# Altium PCB HighSpeed.PcbDoc
Units mm, origin at the board's own origin, x right, y up, seen from the top; angles counter-clockwise.
Board outline 152.4 x 101.6 mm, 4 copper layers (Top Layer, Signal Layer 1, Signal Layer 2, Bottom Layer), stack 0.778 mm thick; 138 components, 108 nets, 447 pads, 22 vias.
Unrouted connection lines stored in the file: 293.
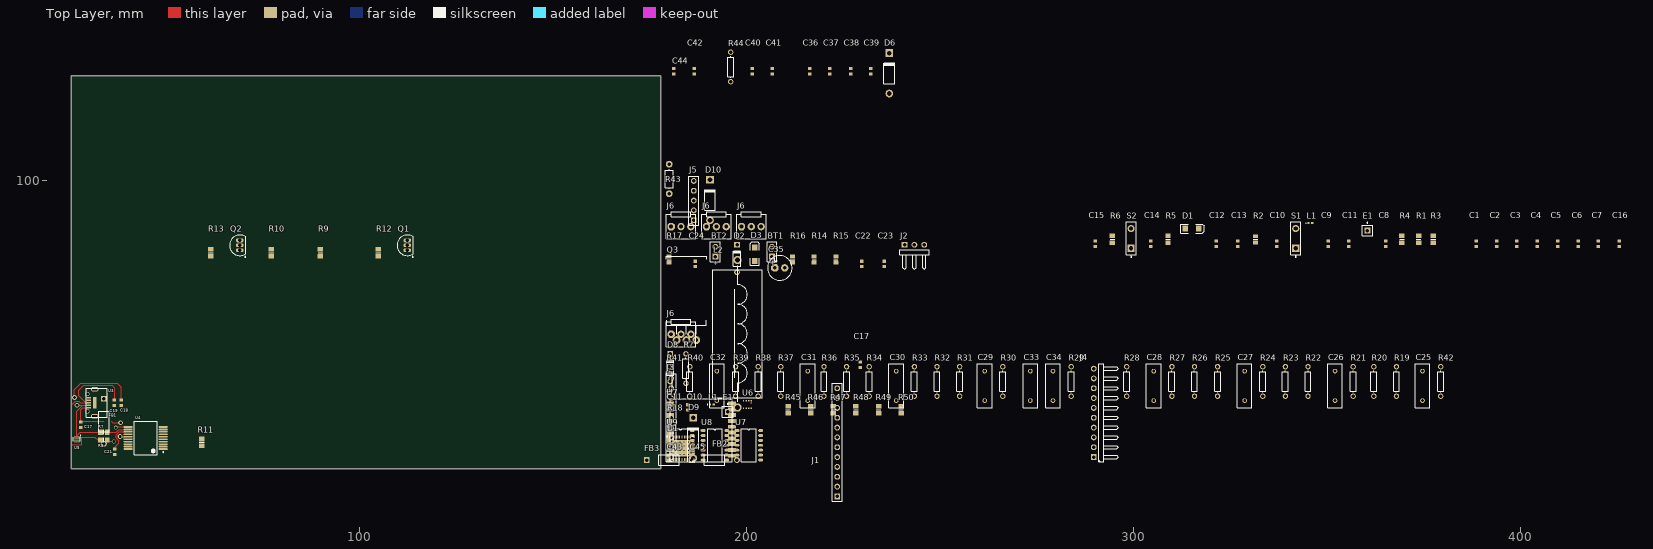
[diagram p0: Top Layer view]
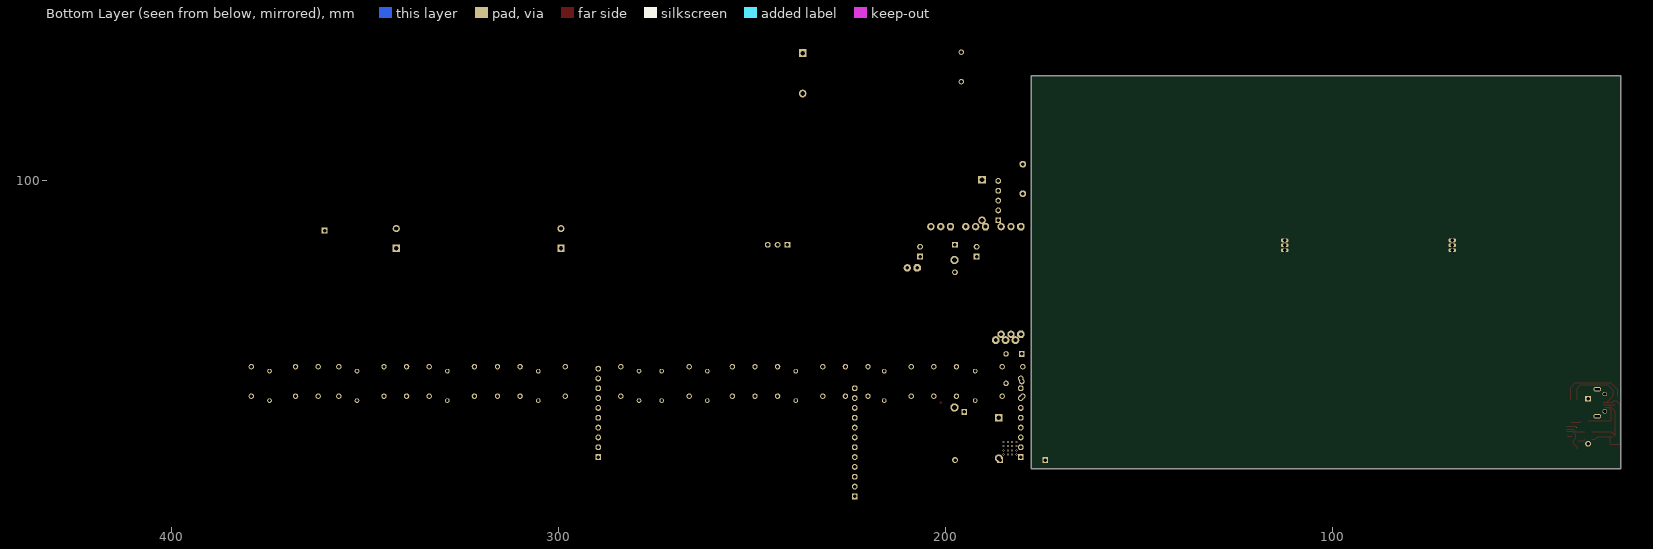
[diagram p1: Bottom Layer view, seen from below]
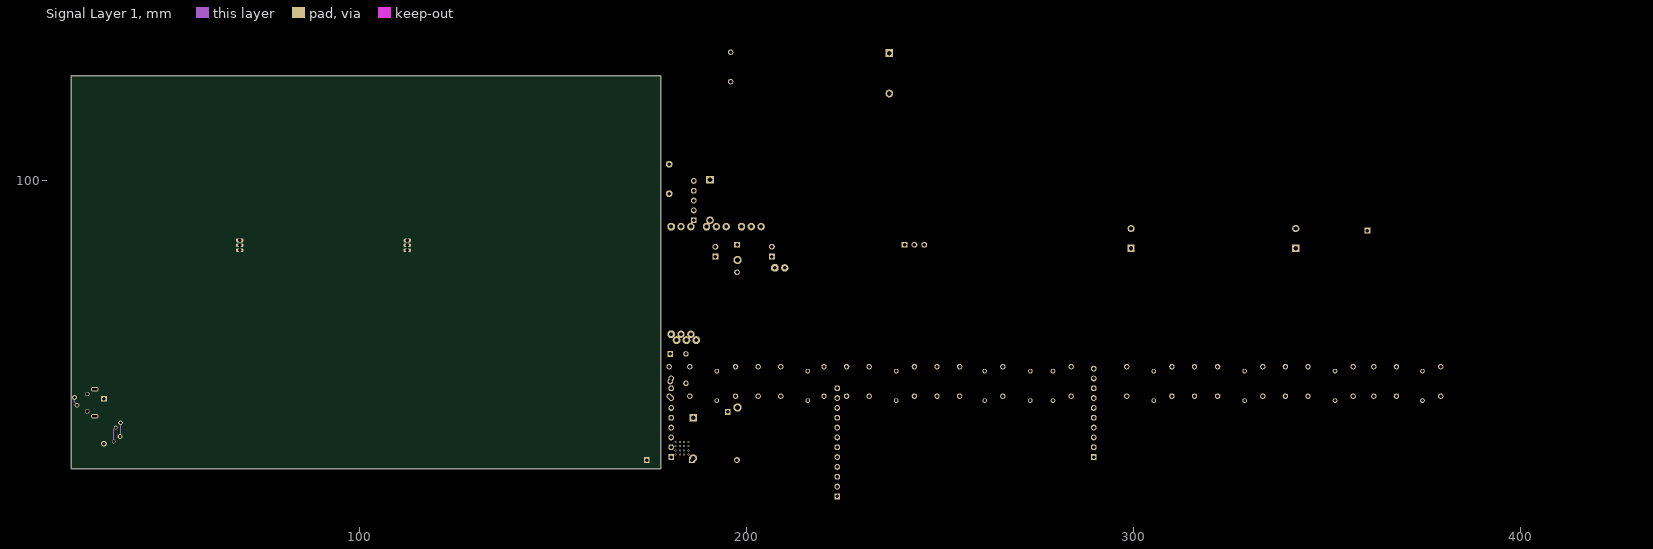
[diagram p2: Signal Layer 1]

## Layer stack, top to bottom
Top Solder: solder mask 0.0102, Solder Resist, Dk 3.5
Top Layer: signal copper 0.0356
Dielectric 1: core 0.254, FR-4, Dk 4.2
Signal Layer 1: signal copper 0.036
Dielectric 3: prepreg 0.127, Dk 4.2
Signal Layer 2: signal copper 0.036
Dielectric 2: core 0.254, Dk 4.2
Bottom Layer: signal copper 0.0356
Bottom Solder: solder mask 0.0102, Solder Resist, Dk 3.5

## Board outline
25.4,25.4 177.8,25.4 177.8,127 25.4,127

## Design rules (kind name [scope] priority, off if disabled: settings)
Clearance [All] p1: gap=0.254
DiffPairsRouting DiffPairsRouting_1 [All] p1: maxlimit=0.254 minlimit=0.254 mostfreqgap=0.254 toplayer_minwidth=0.15 toplayer_maxwidth=0.35 toplayer_prefwidth=0.2 midlayer1_minwidth=0.15 midlayer1_maxwidth=0.35 midlayer1_prefwidth=0.2 midlayer2_minwidth=0.15 midlayer2_maxwidth=0.35 midlayer2_prefwidth=0.2 bottomlayer_minwidth=0.15 bottomlayer_maxwidth=0.35 bottomlayer_prefwidth=0.2 maxuncoupledlength=12.7
DiffPairsRouting [All] p2: maxlimit=0.254 minlimit=0.254 mostfreqgap=0.254 toplayer_minwidth=0.381 toplayer_maxwidth=0.381 toplayer_prefwidth=0.381 midlayer1_minwidth=0.381 midlayer1_maxwidth=0.381 midlayer1_prefwidth=0.381 midlayer2_minwidth=0.381 midlayer2_maxwidth=0.381 midlayer2_prefwidth=0.381 bottomlayer_minwidth=0.381 bottomlayer_maxwidth=0.381 bottomlayer_prefwidth=0.381 maxuncoupledlength=12.7
HoleToHoleClearance [All] p1: gap=0.1 allowstackedmicrovias=TRUE
MinimumSolderMaskSliver [All] p1: minsoldermaskwidth=0.05
PolygonConnect [All] p1: connectstyle=Relief reliefconductorwidth=0.254 reliefentries=4 polygonreliefangle="90 Angle" airgapwidth=0.254
RoomDefinition "VDB Linear Regulators" [InComponentClass('VDB Linear Regulators')] p1: confinementstyle=ConfineIn formatcopy=TRUE lockcomponents=FALSE outline 178.943,113.538 272.923,113.538 272.923,136.652 178.943,136.652
RoomDefinition "USB to Serial" [InComponentClass('USB to Serial')] p2: confinementstyle=ConfineIn formatcopy=TRUE lockcomponents=FALSE outline 25.4,25.4 122.936,25.4 122.936,105.41 25.4,105.41
RoomDefinition "Pump Drive" [InComponentClass('Pump Drive')] p3: confinementstyle=ConfineIn formatcopy=TRUE lockcomponents=FALSE outline 178.943,88.138 192.278,88.138 192.278,103.886 178.943,103.886
RoomDefinition "Pressure, GPS, Temp Sensors" [InComponentClass('Pressure, GPS, Temp Sensors')] p4: confinementstyle=ConfineIn formatcopy=TRUE lockcomponents=FALSE outline 178.943,72.39 247.396,72.39 247.396,86.868 178.943,86.868
RoomDefinition MCU [InComponentClass('MCU')] p5: confinementstyle=ConfineIn formatcopy=TRUE lockcomponents=FALSE outline 287.909,77.597 427.99,77.597 427.99,140.843 287.909,140.843
RoomDefinition Amplifiers [InComponentClass('Amplifiers')] p6: confinementstyle=ConfineIn formatcopy=TRUE lockcomponents=FALSE outline 178.943,26.924 383.032,26.924 383.032,55.372 178.943,55.372
RoutingVias [All] p1: holewidth=0.711 width=1.27 viastyle="Through Hole" minholewidth=0.711 minwidth=1.27 maxholewidth=0.711 maxwidth=1.27
SilkToSilkClearance [All] p1: silktosilkclearance=0.1
SilkToSolderMaskClearance [IsPad] p1: minsilkscreentomaskgap=0.05 clearancetoexposedcopper=TRUE
SolderMaskExpansion [All] p1: expansion=0.102
Width [All] p1: maxlimit=0.254 minlimit=0.254 preferedwidth=0.254
25 further rules are at their usual default settings.

## Classes and differential pairs
component class "VDB Linear Regulators": * C36 C37 C38 C39 C40 C41 C42 C43 C44 C45 D6 FB2 J2 J6 R44 U8 U9
component class "USB to Serial": C17 C18 C19 C21 FB1 Q1 Q2 R7 R8 R9 R10 R11 R12 R13 U3 U4 U5
component class "Pump Drive": C35 D10 J5 L2 Q3 R43
component class "Pressure, GPS, Temp Sensors": * BT1 BT2 BT? C22 C23 C24 D8 D9 J2 J3 R14 R15 R16 R17 R18 R? U6 U7
component class MCU: C1 C2 C3 C4 C5 C6 C7 C8 C9 C10 C11 C12 C13 C14 C15 C16 C17 D1 D2 D3 D6 E1 J1 L1 R1 R2 R3 R4 R5 R6 R45 R46 R47 R48 R49 R50 S1 S2 U1 U2 Y1 Y2
component class Amplifiers: C25 C26 C27 C28 C29 C30 C31 C32 C33 C34 J4 R19 R20 R21 R22 R23 R24 R25 R26 R27 R28 R29 R30 R31 R32 R33 R34 R35 R36 R37 R38 R39 R40 R41 R42 U7 U8 U9
differential pair DIFF90: +DIFF90_P -DIFF90_N

## Components (designator, comment, footprint, x,y, rotation, side; value= is the part's Value field where it differs from the comment)
BT1 "Battery" BAT-2 206.502,81.534 r90 top
BT2 "Battery" BAT-2 191.897,81.534 r90 top
C1 "Cap" 1608[0603] 388.493,83.566 r90 top
C2 "Cap" 1608[0603] 393.827,83.566 r90 top
C3 "Cap" 1608[0603] 399.034,83.566 r90 top
C4 "Cap" 1608[0603] 404.368,83.566 r90 top
C5 "Cap" 1608[0603] 409.575,83.566 r90 top
C6 "Cap" 1608[0603] 414.909,83.566 r90 top
C7 "Cap" 1608[0603] 420.116,83.566 r90 top
C8 "Cap" 1608[0603] 365.125,83.566 r90 top
C9 "Cap" 1608[0603] 350.266,83.566 r90 top
C10 "Cap" 1608[0603] 336.931,83.566 r90 top
C10 "Cap" 1608[0603] 184.785,41.275 r90 top
C11 "Cap" 1608[0603] 355.6,83.566 r90 top
C11 "Cap" 1608[0603] 179.705,41.275 r90 top
C12 "Cap" 1608[0603] 321.31,83.566 r90 top
C13 "Cap" 1608[0603] 326.898,83.566 r90 top
C14 "Cap" 1608[0603] 304.419,83.566 r90 top
C15 "Cap" 1608[0603] 290.068,83.566 r90 top
C16 "Cap" 1608[0603] 425.45,83.566 r90 top
C17 "Cap" 1608[0603] 229.362,52.324 r90 top
C17 "Cap" 1608[0603] 27.889,36.808 r90 top
C18 "Cap" 1608[0603] 38.303,42.458 r90 top
C19 "Cap" 1608[0603] 36.525,42.523 r90 top
C21 "Cap" 1608[0603] 36.652,29.82 r90 top
C22 "Cap" 1608[0603] 229.743,78.359 r90 top
C23 "Cap" 1608[0603] 235.585,78.359 r90 top
C24 "Cap" 1608[0603] 186.69,78.359 r90 top
C25 "Cap" RAD-0.3 374.65,46.863 r90 top
C26 "Cap" RAD-0.3 352.044,46.863 r90 top
C27 "Cap" RAD-0.3 328.676,46.863 r90 top
C28 "Cap" RAD-0.3 305.181,46.863 r90 top
C29 "Cap" RAD-0.3 261.493,46.863 r90 top
C30 "Cap" RAD-0.3 238.633,46.863 r90 top
C31 "Cap" RAD-0.3 215.773,46.863 r90 top
C32 "Cap" RAD-0.3 192.278,46.863 r90 top
C33 "Cap" RAD-0.3 273.304,46.863 r90 top
C34 "Cap" RAD-0.3 279.146,46.863 r90 top
C35 "47uF/50V" CE250/100 207.264,77.343 r0 top
C36 "Cap" 1608[0603] 216.281,128.143 r90 top
C37 "Cap" 1608[0603] 221.488,128.143 r90 top
C38 "Cap" 1608[0603] 226.822,128.143 r90 top
C39 "Cap" 1608[0603] 232.029,128.143 r90 top
C40 "Cap" 1608[0603] 201.422,128.143 r90 top
C41 "Cap" 1608[0603] 206.629,128.143 r90 top
C42 "Cap" 1608[0603] 186.436,128.143 r90 top
C43 "Cap" 1608[0603] 179.705,28.321 r90 top
C44 "Cap" 1608[0603] 181.102,128.143 r90 top
C45 "Cap" 1608[0603] 185.547,28.321 r90 top
D1 "LED2" 3.2X1.6X1.1 315.087,87.503 r0 top
D2 "TVS DIODE" DO-35 197.485,79.756 r90 top
D3 "TVS DIODE" 3.2X1.6X1.1 202.057,80.899 r90 top
D6 "TVS DIODE" DO-41 236.855,127.635 r90 top
D8 "Diode 1N4148" DO-35 180.213,51.562 r90 top
D9 "Diode 11DQ03" DO-204AL 186.182,33.401 r90 top
D10 "Diode 1N4007" DO-41 190.5,94.869 r90 top
E1 "Antenna" PIN1 360.426,86.995 r0 top
E1 "Antenna" PIN1 195.072,40.132 r0 top
FB1 "11 Ohms @ 100 MHz" PIN-W2/E2.8 33.858,37.694 r270 top
FB2 "11 Ohms @ 100 MHz" PIN-W2/E2.8 191.643,27.686 r0 top
FB3 "11 Ohms @ 100 MHz" PIN-W2/E2.8 179.959,27.686 r0 top
J1 "Header 12" HDR1X12 223.393,18.288 r90 top
J2 "Header 3H" HDR1X3H 240.792,83.312 r0 top
J3 "Header 9" HDR1X9 180.467,28.448 r90 top
J4 "Header 10H" HDR1X10H 289.687,28.448 r90 top
J5 "Header 5" HDR1X5 186.309,89.662 r90 top
J6 "+12V" 6410/3pin 180.467,88.011 r0 top
J6 "+12V" 6410/3pin 198.628,88.011 r0 top
J6 "+12V" 6410/3pin 189.611,88.011 r0 top
J6 "+12V" 6410/3pin 180.467,60.198 r0 top
L1 "Inductor" 0402-A 345.694,88.9 r0 top
L1 "Inductor" 0402-A 191.008,42.037 r0 top
L2 "500uH" 1536Y 197.612,41.275 r90 top
Q1 "NPN" TO-226-AA 112.268,83.185 r0 top
Q2 "NPN" TO-226-AA 68.961,83.185 r0 top
Q3 "IRL520" TO-220/3H 181.864,58.674 r0 top
R1 "Res1" 6-0805_N 373.634,84.709 r90 top
R2 "Res1" 6-0805_L 331.47,84.709 r90 top
R3 "Res1" 6-0805_N 377.444,84.709 r90 top
R4 "Res1" 6-0805_N 369.316,84.709 r90 top
R5 "Res1" 6-0805_N 308.864,84.709 r90 top
R6 "Res1" 6-0805_N 294.513,84.709 r90 top
R7 "Res1" 6-0805_N 33.858,34.903 r0 top
R8 "Res1" 6-0805_N 33.858,32.871 r0 top
R9 "Res1" 6-0805_N 89.789,81.28 r90 top
R10 "Res1" 6-0805_N 77.089,81.28 r90 top
R11 "Res1" 6-0805_N 59.131,32.233 r90 top
R12 "Res1" 6-0805_N 104.775,81.28 r90 top
R13 "Res1" 6-0805_N 61.468,81.28 r90 top
R14 "Res1" 6-0805_L 217.424,79.502 r90 top
R15 "Res1" 6-0805_L 223.012,79.502 r90 top
R16 "Res1" 6-0805_L 211.836,79.502 r90 top
R17 "Res1" 6-0805_L 179.959,79.502 r90 top
R18 "Res1" 6-0805_L 179.959,38.227 r90 top
R19 "Res1" AXIAL-0.3 367.919,48.006 r90 top
R20 "Res1" AXIAL-0.3 362.077,48.006 r90 top
R21 "Res1" AXIAL-0.3 356.743,48.006 r90 top
R22 "Res1" AXIAL-0.3 345.059,48.006 r90 top
R23 "Res1" AXIAL-0.3 339.217,48.006 r90 top
R24 "Res1" AXIAL-0.3 333.375,48.006 r90 top
R25 "Res1" AXIAL-0.3 321.691,48.006 r90 top
R26 "Res1" AXIAL-0.3 315.722,48.006 r90 top
R27 "Res1" AXIAL-0.3 309.88,48.006 r90 top
R28 "Res1" AXIAL-0.3 298.196,48.006 r90 top
R29 "Res1" AXIAL-0.3 283.845,48.006 r90 top
R30 "Res1" AXIAL-0.3 266.192,48.006 r90 top
R31 "Res1" AXIAL-0.3 255.016,48.006 r90 top
R32 "Res1" AXIAL-0.3 249.174,48.006 r90 top
R33 "Res1" AXIAL-0.3 243.332,48.006 r90 top
R34 "Res1" AXIAL-0.3 231.648,48.006 r90 top
R35 "Res1" AXIAL-0.3 225.806,48.006 r90 top
R36 "Res1" AXIAL-0.3 219.964,48.006 r90 top
R37 "Res1" AXIAL-0.3 208.788,48.006 r90 top
R38 "Res1" AXIAL-0.3 202.946,48.006 r90 top
R39 "Res1" AXIAL-0.3 197.104,48.006 r90 top
R40 "Res1" AXIAL-0.3 185.293,48.006 r90 top
R41 "Res1" AXIAL-0.3 179.959,48.006 r90 top
R42 "Res1" AXIAL-0.3 379.349,48.006 r90 top
R43 "Res1" R300H 179.959,96.52 r90 top
R44 "Res1" AXIAL-0.3 195.834,129.286 r90 top
R45 "Res1" 6-0805_N 210.693,40.64 r90 top
R46 "Res1" 6-0805_N 216.535,40.64 r90 top
R47 "Res1" 6-0805_N 222.377,40.64 r90 top
R48 "Res1" 6-0805_N 228.219,40.64 r90 top
R49 "Res1" 6-0805_N 234.061,40.64 r90 top
R50 "Res1" 6-0805_N 239.903,40.64 r90 top
R? "Res1" AXIAL-0.3 184.277,51.308 r90 top
S1 "RESET" SPST-2 341.884,84.963 r90 top
S2 "BTN-0" SPST-2 299.339,84.963 r90 top
U1 "ESP32" QFN40P600X600X90_HS-49N 183.261,30.734 r0 top
U3 "USB Shield" UJ2-MIBH2-4-SMT 29.921,41.191 r180 top
U4 "FT231XS" SOP64P1030X175-20N 44.653,33.379 r180 top
U5 "TPD4S012" SON50P100X60-6N 26.873,33.063 r270 top
U6 "BME280" LGA8C65P4X4_250X250X100 200.152,42.037 r0 top
U7 "XA1100" FGPMMOPA6H 196.215,42.291 r0 top
U7 "LM660" SOIC-14 200.533,31.496 r0 top
U8 "LM660" SOIC-14 191.77,31.496 r0 top
U9 "LM660" SOIC-14 182.88,31.496 r0 top

## Footprints (in the part's own frame and the unit in brackets; to place one, negate y for a bottom-side part, rotate by r counter-clockwise, add the part's x,y. Pads: shape width x height; smd on the part's side, far side on the other; paste and mask are expansions set on the pad)
3.2X1.6X1.1 [mm] "SMT LED; 2 Flat Leads"
  rect 1.5x1.5 smd: 1(-1.75,0) 2(1.75,0)
  silkscreen extent -2.9,-1.15 3.2,1.15
6-0805_L [mm] "Chip Resistor, Body 2.0x1.2mm, IPC High Density"
  rect 1x1.3 smd: 1(-0.8,0) 2(0.8,0)
  silkscreen extent 0,-0.55 0,0.55, body extent -1.07,-0.7 1.07,0.7, height 0.7
6-0805_N [mm] "Chip Resistor, Body 2.0x1.2mm, IPC Medium Density"
  rect 1.2x1.4 smd: 1(-0.9,0) 2(0.9,0)
  silkscreen extent 0,-0.6 0,0.6, body extent -1.07,-0.7 1.07,0.7, height 0.7
0402-A [mm] "Chip Inductor, Body 1.0x0.5mm, IPC High Density"
  rect 0.6x0.5 smd: 1(-0.5,0) 2(0.5,0)
  silkscreen extent -1.1,-0.15 -1.1,0.15, body extent -0.55,-0.3 0.55,0.3, height 0.55
1536Y [mil] "Inductor 500uH"
  round 85 hole 50: 1(0,0) 2(1500,0)
  silkscreen extent 60,-250 1440,250
1608[0603] [mm] "Chip Capacitor, Body 1.6x0.8mm, IPC High Density"
  rect 0.8x0.9 smd: 1(-0.7,0) 2(0.7,0)
  body extent -0.87,-0.48 0.87,0.48, height 1.3
6410/3pin [mil] "3-pin Power Connector"
  oct 75x75 hole 40: 1(0,0)
  round 75 hole 40: 2(100,0) 3(200,0)
  silkscreen extent -50,-125 250,150, body extent -50,-114 250,114, height 461
AXIAL-0.3 [mm] "Axial Device, Thru-Hole; 2 Leads; 0.3 in Pin Spacing"
  round 1.4 hole 0.85: 1(-3.81,0) 2(3.81,0)
  silkscreen extent -2.77,-0.76 2.77,0.76
BAT-2 [mm] "Battery; 2 Leads"
  rect 1.5x1.5 hole 0.9: 1(-1.27,0)
  round 1.5 hole 0.9: 2(1.27,0)
  silkscreen extent -2.54,-1.27 2.54,1.27
CE250/100 [mil]
  oct 75x75 hole 35: 1(0,0)
  round 75 hole 35: 2(100,0)
  silkscreen extent -75,-125 175,125
DO-35 [mm] "Diode, Axial; Body 3.8 x 1.9 mm (LxDia. max), Lead Dia. 0.53 mm (max)"
  round 1.5 hole 0.9: 1(-3.55,0)
  rect 1.5x1.5 hole 0.9: 2(3.55,0)
  silkscreen extent -1.95,-0.95 2.05,0.95
DO-41 [mm] "Diode, Axial; Body 5.2 x 2.7 mm (LxDia. max), Lead Dia. 0.86 mm (max)"
  round 2 hole 1.2: 1(-5.23,0)
  rect 2x2 hole 1.2: 2(5.23,0)
  silkscreen extent -2.65,-1.4 2.75,1.4
DO-204AL [mm] "Diode, Axial; Body 5.2 x 2.7 mm (LxDia. max), Lead Dia. 0.86 mm (max)"
  round 2 hole 1.2: 1(-5.23,0)
  rect 2x2 hole 1.2: 2(5.23,0)
  silkscreen extent -2.65,-1.4 2.75,1.4
FGPMMOPA6H [mm] "GPS Module"
  rect 2x1 smd: "1 VCC"(-16,0) "2 NRESET"(-16,-1.5) "3 GND"(-16,-3) "4 VBACKUP"(-16,-4.5) "5 3D-FIX"(-16,-6) "6 NC"(-16,-7.5) "7 NC"(-16,-9) "8 GND"(-16,-10.5) "9 TX"(-16,-12) "10 RX"(-16,-13.5) "11 EX_ANT"(0,-13.5) "12 GND"(0,-12) "13 1PPS"(0,-10.5) "14 RTCM"(0,-9) "15 NC"(0,-7.5) "16 NC"(0,-6) "17 NC"(0,-4.5) "18 NC"(0,-3) "19 GND"(0,-1.5) "20 NC"(0,0)
  silkscreen extent -16,-15 0,1.25
HDR1X3H [mm] "Connector; Header; 3 Position; Right Angle"
  rect 1.5x1.5 hole 0.9: 1(0,0)
  round 1.5 hole 0.9: 2(2.54,0) 3(5.08,0)
  silkscreen extent -1.27,-6.35 6.35,-1.27
HDR1X5 [mm] "Connector; Header; 5 Position"
  rect 1.5x1.5 hole 0.9: 1(0,0)
  round 1.5 hole 0.9: 2(2.54,0) 3(5.08,0) 4(7.62,0) 5(10.16,0)
  silkscreen extent -1.27,-1.27 11.43,1.27
HDR1X9 [mm] "Connector; Header; 9 Position"
  rect 1.5x1.5 hole 0.9: 1(0,0)
  round 1.5 hole 0.9: 2(2.54,0) 3(5.08,0) 4(7.62,0) 5(10.16,0) 6(12.7,0) 7(15.24,0) 8(17.78,0) 9(20.32,0)
  silkscreen extent -1.27,-1.27 21.59,1.27
HDR1X10H [mm] "Connector; Header; 10 Position; Right Angle"
  rect 1.5x1.5 hole 0.9: 1(0,0)
  round 1.5 hole 0.9: 2(2.54,0) 3(5.08,0) 4(7.62,0) 5(10.16,0) 6(12.7,0) 7(15.24,0) 8(17.78,0) 9(20.32,0) 10(22.86,0)
  silkscreen extent -1.27,-6.35 24.13,-1.27
HDR1X12 [mm] "Connector; Header; 12 Position"
  rect 1.5x1.5 hole 0.9: 1(0,0)
  round 1.5 hole 0.9: 2(2.54,0) 3(5.08,0) 4(7.62,0) 5(10.16,0) 6(12.7,0) 7(15.24,0) 8(17.78,0) 9(20.32,0) 10(22.86,0) 11(25.4,0) 12(27.94,0)
  silkscreen extent -1.27,-1.27 29.21,1.27
LGA8C65P4X4_250X250X100 [mm] "LGA, 8-Leads, Body 2.50x2.50mmx1.00mm, Pitch 0.65mm"
  rect 0.35x0.35 smd: 1(0.975,0.975) 2(0.325,0.975) 3(-0.325,0.975) 4(-0.975,0.975) 5(-0.975,-0.975) 6(-0.325,-0.975) 7(0.325,-0.975) 8(0.975,-0.975)
  Top Layer circle w0.05: c1,0.5 r0.15
  body extent -1.25,-1.25 1.25,1.25, height 1
PIN1 [mm] "Generic Antenna; 1 Lead"
  rect 1.5x1.5 hole 0.9: 1(0,0)
  silkscreen extent -1.4,-1.4 1.4,2.17
PIN-W2/E2.8 [mm] "Thru-Hole; 2 Leads"
  rect 1.5x1.5 hole 0.9: 1(-5.825,0)
  round 1.5 hole 0.9: 2(5.825,0)
  silkscreen extent -2.65,-1.4 2.65,1.4
QFN40P600X600X90_HS-49N [mm] "QFN, 48-Leads, Body 6.00x6.00mm, Pitch 0.40mm, Thermal Pad 4.30x4.30mm, IPC Medium Density"
  oval 0.85x0.2 smd: 1(-2.9,2.2) 2(-2.9,1.8) 3(-2.9,1.4) 4(-2.9,1) 5(-2.9,0.6) 6(-2.9,0.2) 7(-2.9,-0.2) 8(-2.9,-0.6) 9(-2.9,-1) 10(-2.9,-1.4) 11(-2.9,-1.8) 12(-2.9,-2.2) 25(2.9,-2.2) 26(2.9,-1.8) 27(2.9,-1.4) 28(2.9,-1) 29(2.9,-0.6) 30(2.9,-0.2) 31(2.9,0.2) 32(2.9,0.6) 33(2.9,1) 34(2.9,1.4) 35(2.9,1.8) 36(2.9,2.2)
  oval 0.2x0.85 smd: 13(-2.2,-2.9) 14(-1.8,-2.9) 15(-1.4,-2.9) 16(-1,-2.9) 17(-0.6,-2.9) 18(-0.2,-2.9) 19(0.2,-2.9) 20(0.6,-2.9) 21(1,-2.9) 22(1.4,-2.9) 23(1.8,-2.9) 24(2.2,-2.9) 37(2.2,2.9) 38(1.8,2.9) 39(1.4,2.9) 40(1,2.9) 41(0.6,2.9) 42(0.2,2.9) 43(-0.2,2.9) 44(-0.6,2.9) 45(-1,2.9) 46(-1.4,2.9) 47(-1.8,2.9) 48(-2.2,2.9)
  rect 4.3x4.3 smd: 49(0,0)
  silkscreen extent -3.95,-3.17 3.17,3.17, body extent -3.03,-3.03 3.03,3.03, height 0.9
R300H [mil]
  round 70 hole 35: 1(0,0) 2(300,0)
  silkscreen extent 50,-40 250,40
RAD-0.3 [mm] "Radial Cap, Thru-Hole; 2 Leads; 0.3 in Pin Spacing"
  round 1.2 hole 0.7: 1(-3.81,0) 2(3.81,0)
  silkscreen extent -5.71,-1.91 5.71,1.91
SOIC-14 [mm]
  oct 1.25x0.75 smd: 1(-3.048,3.81)
  oval 1.25x0.75 smd: 2(-3.048,2.54) 3(-3.048,1.27) 4(-3.048,0) 5(-3.048,-1.27) 6(-3.048,-2.54) 7(-3.048,-3.81) 8(3.048,-3.81) 9(3.048,-2.54) 10(3.048,-1.27) 11(3.048,0) 12(3.048,1.27) 13(3.048,2.54) 14(3.048,3.81)
  silkscreen extent -1.91,-4.32 1.91,4.32, body extent -3.17,-4.32 3.17,4.32, height 1.52
SON50P100X60-6N [mm] "SON, 6-Leads, Body 1.45x1.00mm, Pitch 0.50mm, IPC Medium Density"
  rect 0.7x0.2 smd: 1(-0.465,0.5) 2(-0.465,0) 3(-0.465,-0.5) 4(0.465,-0.5) 5(0.465,0) 6(0.465,0.5)
  silkscreen extent -0.97,-0.9 0.53,0.95, body extent -0.58,-0.75 0.58,0.75, height 0.6
SOP64P1030X175-20N [mm] "SOP, 20-Leads, Body 8.65x3.90mm, Pitch 0.64mm, IPC Medium Density"
  oval 2.35x0.45 smd: 1(-4.525,2.857) 2(-4.525,2.222) 3(-4.525,1.587) 4(-4.525,0.952) 5(-4.525,0.317) 6(-4.525,-0.318) 7(-4.525,-0.953) 8(-4.525,-1.588) 9(-4.525,-2.223) 10(-4.525,-2.858) 11(4.525,-2.857) 12(4.525,-2.222) 13(4.525,-1.587) 14(4.525,-0.952) 15(4.525,-0.317) 16(4.525,0.318) 17(4.525,0.953) 18(4.525,1.588) 19(4.525,2.223) 20(4.525,2.858)
  silkscreen extent -4.65,-4.35 2.95,4.35, body extent -5.15,-4.35 5.15,4.35, height 1.75
SPST-2 [mm] "Switch; 2 Leads"
  rect 1.85x1.85 hole 1.1: 1(-2.54,0)
  round 1.85 hole 1.1: 2(2.54,0)
  silkscreen extent -4.89,-1.27 4.28,1.27
TO-220/3H [mil]
  round 80 hole 40: 1(0,0) 2(100,0) 3(200,0)
  silkscreen extent -105,60 305,855
TO-226-AA [mm] "TO, Flat Index; 3 In-Line, Axial Leads; Body Dia. 4.8mm; Leads 0.55 x 0.51 mm (max)"
  oval 2x1 hole 0.9: 1(0,-1.27) 2(0,0) 3(0,1.27)
  silkscreen extent -2.65,-3.13 1.52,2.65, body extent -2.65,-2.66 1.52,2.66, height 5.33
UJ2-MIBH2-4-SMT [mm] "USB MICRO-B Jack"
  oval 2x1.2 hole 0.6 slot 1.4 at 0 deg: 0(-1.55,2.2) 0(-1.55,-4.8)
  oval 1.2x1.05 hole 0.65 slot 0.8 at 0 deg: 0(0.4,0.925) 0(0.4,-3.525)
  rect 1.2x0.4 smd: 1(0,0) 2(0,-0.65) 3(0,-1.3) 4(0,-1.95) 5(0,-2.6)
  rect 0.9x3 smd: 9(-1.55,-1.3)
  silkscreen extent -4.75,-5 0.6,2.5

## Part data
BT1 BT2: "Multicell Battery"
C1 C2 C3 C4 C5 C6 C7 C8 C9 C10 C10 C11 C11 C12 C13 C14 C15 C16 C17 C17 C18 C19 C21 C22 C23 C24 C25 C26 C27 C28 C29 C30 C31 C32 C33 C34 C36 C37 C38 C39 C40 C41 C42 C43 C44 C45: "Capacitor"
C35: library part C-EL, "Capacitor Electrolytic TH"
D1: "Typical RED, GREEN, YELLOW, AMBER GaAs LED"
D8: "High Conductance Fast Diode"
D9: "Schottky Rectifier"
D10: "1 Amp General Purpose Rectifier"
E1 E1: "Generic Antenna"
FB1 FB2 FB3: library part "Fuse 1", "Fuse"
J1: "Header, 12-Pin"
J2: "Header, 3-Pin, Right Angle"
J3: "Header, 9-Pin"
J4: "Header, 10-Pin, Right Angle"
J5: "Header, 5-Pin"
J6 J6 J6 J6: library part CON3, "Connector 3 pin"
L2: library part 1536Y, "Power Inductor TH"
Q1 Q2: "NPN Bipolar Transistor"
Q3: library part IRL540, "Power MOSFET"
R1 R2 R3 R4 R5 R6 R7 R8 R9 R10 R11 R12 R13 R14 R15 R16 R17 R18 R19 R20 R21 R22 R23 R24 R25 R26 R27 R28 R29 R30 R31 R32 R33 R34 R35 R36 R37 R38 R39 R40 R41 R42 R43 R44 R45 R46 R47 R48 R49 R50 R?: "Resistor"
S1 S2: library part SW-SPST, "Single-Pole, Single-Throw Switch"
U1: "Microcontroller"
U4: "USB-UART Interface"
U5: "4-Channel ESD Solution"
U6: "Digital Environmental Sensor"
U7 U8 U9: "Quad opamplifiers"

## Via types
v1: diameter 0.5, hole 0.2, Top Layer to Bottom Layer, 16 vias
v2: diameter 1.27, hole 0.711, Top Layer to Signal Layer 1, 4 vias
v3: diameter 1, hole 0.711, Top Layer to Signal Layer 1, 2 vias

## Nets (pads, with @x,y where several pads share a name; then routed paths per layer and width w, separated by ;. In a path a pad name is that pad's centre, name@x,y a point inside that pad or via, vN(x,y) a via of type N, cw(c..) or ccw(c..) an arc to the next point about the centre after c; other vN are vias at no path point)
1PPS: J3.1
"3.3V OUT": J3.9
+5V: C33.2 C34.2 U7.4 U8.4
+14V: C35.1 D10.2 J5.1 J5.2
CAP1: C8.2 C9.2 R1.1 U1.48
CAP2: C8.1 R1.2 U1.47
CD/DAT3: BT2.2 C1.1 C2.1 C3.1 C4.1 C5.1 C6.1 C7.1 C7.2 C9.1 C10.1 C10.2 C11.2 C14.1 C15.1 C16.2 C17.1@27.889,36.108 C17.2@229.362,53.024 C18.1 C19.1 C21.1 C22.1 C23.1 C24.1 C33.1 C34.1 C36.1 C37.2 C38.1 C39.2 C40.1 C41.2 C42.1 C43.1 C44.1 C45.1 D2.1 D2.2 D3.1 D3.2 D6.1 D6.2 E1.1 J1.1 J1.2 J1.3 J1.4 J1.5 J1.6 J1.7 J1.8 J1.9 J1.10 J1.11 J1.12 J2.3 J3.3 J4.1 J4.10 J6.1 J6.2 L1.1@345.194,88.9 L1.2@191.508,42.037 R6.1 R17.1 R19.1 R20.1 R22.1 R23.1 R25.1 R26.1 R28.1 R29.1 R31.1 R32.1 R34.1 R35.1 R37.1 R38.1 R40.1 R41.1 R45.1 R46.1 R47.1 R48.1 R49.1 R50.1 S1.1 S2.1 U1.26 U1.28 U1.29 U1.30 U1.31 U1.32 U1.33 U1.49 U3.5 U4.6 U4.16 U5.4 U7.11 U8.11 U9.2
DIFF90_N: C18.2 R7.1 U3.2 U5.2 | length 39.7
  Top Layer w0.254: v2@26.238,44.127 26.238,45.908 27.806,47.476 30.45,47.476 30.454,47.48 32.488,47.48 32.492,47.476 37.36,47.476 38.303,46.533 C18.2 ; v2(26.873,41.841) U3.2 ; U5.2@26.881,33.825 26.881,34.025 ; U3.2@29.413,41.809 28.365,41.809 28.227,41.671 28.2,41.671 27.381,40.852 27.381,40.825 26.881,40.325 26.881,34.025 ; R7.1 27.759,34.903 26.881,34.025
  Signal Layer 1 w0.254: v2(26.238,43.873) 26.238,42.73 26.873,42.095 v2(26.873,41.841)
DIFF90_P: C19.2 R8.1 U3.3 U5.1 | length 42.9
  Top Layer w0.254: U5.1@27.354,33.633 28.143,33.633 ; U3.3@29.54,42.476 27.675,42.476 27.294,42.857 26.452,42.857 25.603,42.008 25.603,31.793 25.73,31.666 28.016,31.666 28.143,31.793 28.143,33.633 ; U3.3 29.144,42.491 27.381,44.254 27.381,45.763 28.586,46.968 30.661,46.968 30.665,46.972 32.277,46.972 32.281,46.968 35.963,46.968 36.703,46.228 C19.2@36.703,43.307 ; R8.1 32.231,32.871 31.469,33.633 28.143,33.633
ENABLE: J3.8
FIX: J3.6
GND: J5.4 J5.5 Q3.3 R43.2
GPIO0/ADC2_CH1/TOUCH1/RTC_GPIO11/CLK_OUT1: Q2.1 R5.1 S2.2 U1.23
GPIO2/ADC2_CH2/TOUCH2/RTC_GPIO12/SD_DATA0: U1.22
GPIO4/ADC2_CH0/TOUCH0/RTC_GPIO10/SD_DATA1: C31.2 R36.2 U1.24 U9.8
GPIO5/VSPICS0: U1.34
GPIO12/ADC2_CH5/TOUCH5/RTC_GPIO15/MTDI: C29.2 R30.2 U1.18
GPIO13/ADC2_CH4/TOUCH4/RTC_GPIO14/MTCK/SD_DATA0: C30.2 R33.2 U1.20 U9.7
GPIO14/ADC2_CH6/TOUCH6/RTC_GPIO16/MTMS/SD_CLK: C28.2 R27.2 U1.17 U7.14
GPIO15/ADC2_CH3/TOUCH3/RTC_GPIO14/MTCK/SD_CMD: U1.21
GPIO16/U2RXD: J3.5 R18.1 U1.25
GPIO17/U2TXD: D8.2 J3.4 R16.1 U1.27
GPIO18/VSPICLK: C32.2 R39.2 U1.35 U9.14
GPIO19: R44.1 U1.38
GPIO21: U1.42
GPIO22: U1.39
GPIO23/VSPID: D1.1 U1.36
  other v1: 181.611,29.084 182.711,29.084 183.811,29.084 184.911,29.084 181.611,30.184 182.711,30.184 183.811,30.184 184.911,30.184 181.611,31.284 182.711,31.284 183.811,31.284 184.911,31.284 181.611,32.384 182.711,32.384 183.811,32.384 184.911,32.384
GPIO25: C15.2 U1.13
GPIO25/DAC_1/ADC2_CH8/RTC_GPIO6/EMAC_RXD0: C25.2 R42.2 U1.14 U7.1
GPIO26/DAC_2/ADC2_CH9/RTC_GPIO7/EMAC_RXD1: C26.2 R21.2 U1.15 U7.7
GPIO27/ADC2_CH7/TOUCH7/RTC_GPIO17/EMAC_RXD1: C27.2 R24.2 U1.16 U7.8
GPIO32: C14.2 U1.12
GPIO34/ADC1_CH6/RTC_GPIO4: J2.1 U1.10
GPIO35/ADC1_CH7/RTC_GPIO5: U1.11
LNA_IN: C11.1 L1.1@190.508,42.037 L1.2@346.194,88.9 U1.2
Net*_SIG: 
NetBT1_1: BT1.1 D9.1
NetBT1_2: BT1.2 BT2.1
NetC16_1: C16.1 R3.2
NetC17_2: C17.2@27.889,37.508 FB1.1 U3.1 | length 10.5
  Top Layer w0.254: C17.2@27.889,37.694 27.889,40.641 28.411,41.163 28.488,41.163 28.516,41.191 U3.1@29.413,41.191 ; C17.2@28.075,37.694 33.858,37.694
NetC21_2: C21.2 U4.3 U4.13 U4.14 | length 7
  Top Layer w0.254: C21.2 36.652,30.966 37.66,31.974 37.66,32.712 37.033,33.339 37.033,34.181 37.819,34.967 U4.13@39.366,34.967
NetC25_1: C25.1 R19.2 R42.1 U7.2
NetC26_1: C26.1 R21.1 R22.2 U7.6
NetC27_1: C27.1 R24.1 R25.2 U7.9
NetC28_1: C28.1 R27.1 R28.2 U7.13
NetC29_1: C29.1 R30.1 R31.2 U8.2
NetC30_1: C30.1 R33.1 R34.2 U9.6
NetC31_1: C31.1 R36.1 R37.2 U9.9
NetC32_1: C32.1 R39.1 R40.2 U9.13
NetC35_2: C35.2 L2.1
NetC36_2: C36.2 FB2.2 U8.1
NetC38_2: C38.2 U9.1 U9.3
NetC40_2: C40.2
NetC42_2: C42.2 FB3.1
NetC45_2: C45.2 FB2.1
NetD1_2: D1.2 R6.2
NetD8_1: D8.1
NetD9_2: D9.2
NetD10_1: D10.1 L2.2 Q3.2
NetFB3_2: FB3.2
NetJ4_2: J4.2 U9.12
NetJ4_3: J4.3 U9.10
NetJ4_4: J4.4
NetJ4_5: J4.5 U8.3
NetJ4_6: J4.6 U7.12
NetJ4_7: J4.7 U7.10
NetJ4_8: J4.8 U7.5
NetJ4_9: J4.9 U7.3
NetJ6_3: J6.3@203.708,88.011
NetQ1_1: Q1.1 R4.1 S1.2 U1.9
NetQ1_2: Q1.2 R12.1
NetQ1_3: Q1.3 R10.2 R13.2
NetQ2_2: Q2.2 R13.1
NetQ2_3: Q2.3 R11.2 R12.2
NetQ3_1: Q3.1 R43.1
NetR2_1: R2.1 U1.41
NetR7_2: R7.2 U4.12 | length 4.9
  Top Layer w0.254: R7.2 37.037,34.903 37.706,35.572 39.366,35.572 U4.12@39.366,35.602
NetR8_2: R8.2 U4.11 | length 8.2
  Top Layer w0.254: R8.2 35.139,32.49 v3(36.398,32.49) ; v3(36.906,36.046) 37.096,36.237 U4.11@39.366,36.237
  Signal Layer 1 w0.254: v3(36.398,32.49) 36.398,35.665 v3@36.779,36.046
  Bottom Layer w0.254: 36.779,36.046 v3(36.906,36.046)
NetR9_1: R9.1 U4.20
NetR10_1: R10.1 U4.2
NetR11_1: R11.1 U4.1
NetR14_1: R14.1 U6.4
NetR14_2: R14.2 R15.2 R?.1 U6.2 U6.5
NetR15_1: R15.1
NetR17_2: R17.2
NetR18_2: R18.2
NetR20_2: R20.2
NetR23_2: R23.2
NetR26_2: R26.2
NetR29_2: R29.2
NetR32_2: R32.2
NetR35_2: R35.2
NetR38_2: R38.2
NetR41_2: R41.2
NetTP2_1: U6.3
NetTP3_1: 
NetTP15_2: 
OUTPUT_DRIVE: J5.3
SENSOR_CAPN: C13.1 U1.7
SENSOR_CAPP: C12.1 U1.6
SENSOR_VN: C13.2 U1.8
SENSOR_VP: C12.2 U1.5
U0RXD: R9.2 U1.40
U0TXD: R2.2 U4.4
V_USB: FB1.2 U4.15 U5.6 | length 7.3
  Top Layer w0.254: 35.803,37.694 36.181,37.316 v2(38.176,37.316) ; v2(38.049,33.76) U4.15@39.192,33.76
  Signal Layer 1 w0.254: v2(38.049,33.76) 38.176,33.887 v2(38.176,37.316)
VBACKUP: J3.7
VIN: J3.2
XTAL_N: C1.2 C2.2 C3.2 C4.2 C5.2 C6.2 C17.1@229.362,51.624 C22.2 C23.2 C24.2 C37.1 C39.1 C41.1 C44.2 J2.2 R3.1 R4.2 R5.2 R16.2 R44.2 R45.2 R46.2 R47.2 R48.2 R49.2 R50.2 R?.2 U1.1 U1.3 U1.4 U1.19 U1.37 U1.43 U1.44 U1.45 U1.46 U6.6 U6.8 U8.5 U9.5
pads on no net: "U7.1 VCC" "U7.2 NRESET" "U7.3 GND" "U7.4 VBACKUP" "U7.5 3D-FIX" "U7.6 NC" "U7.7 NC" "U7.8 GND" "U7.9 TX" "U7.10 RX" "U7.11 EX_ANT" "U7.12 GND" "U7.13 1PPS" "U7.14 RTCM" "U7.15 NC" "U7.16 NC" "U7.17 NC" "U7.18 NC" "U7.19 GND" "U7.20 NC" C43.2 J6.3@185.547,60.198 J6.3@185.547,88.011 J6.3@194.691,88.011 U3.0 U3.4 U3.9 U4.5 U4.7 U4.8 U4.9 U4.10 U4.17 U4.18 U4.19 U5.3 U5.5 U6.1 U6.7 U8.6 U8.7 U8.8 U8.9 U8.10 U8.12 U8.13 U8.14 U9.4 U9.11

## Text inside footprints (layer, text, board x,y; h text height)
BT1: Top Overlay "+" at 207.079,77.864 h1.15 r90
BT2: Top Overlay "+" at 192.474,77.864 h1.15 r90